# Altium PCB POEInjector.PcbDoc (part 1 of 2)
Units mil, origin at the board's own origin, x right, y up, seen from the top; angles counter-clockwise.
Board outline 5250 x 1900 mil, 4 copper layers (Top Layer, GND Plane, 24V Plane, Bottom Layer), stack 30.634 mil thick; 65 components, 70 nets, 262 pads, 25 vias.
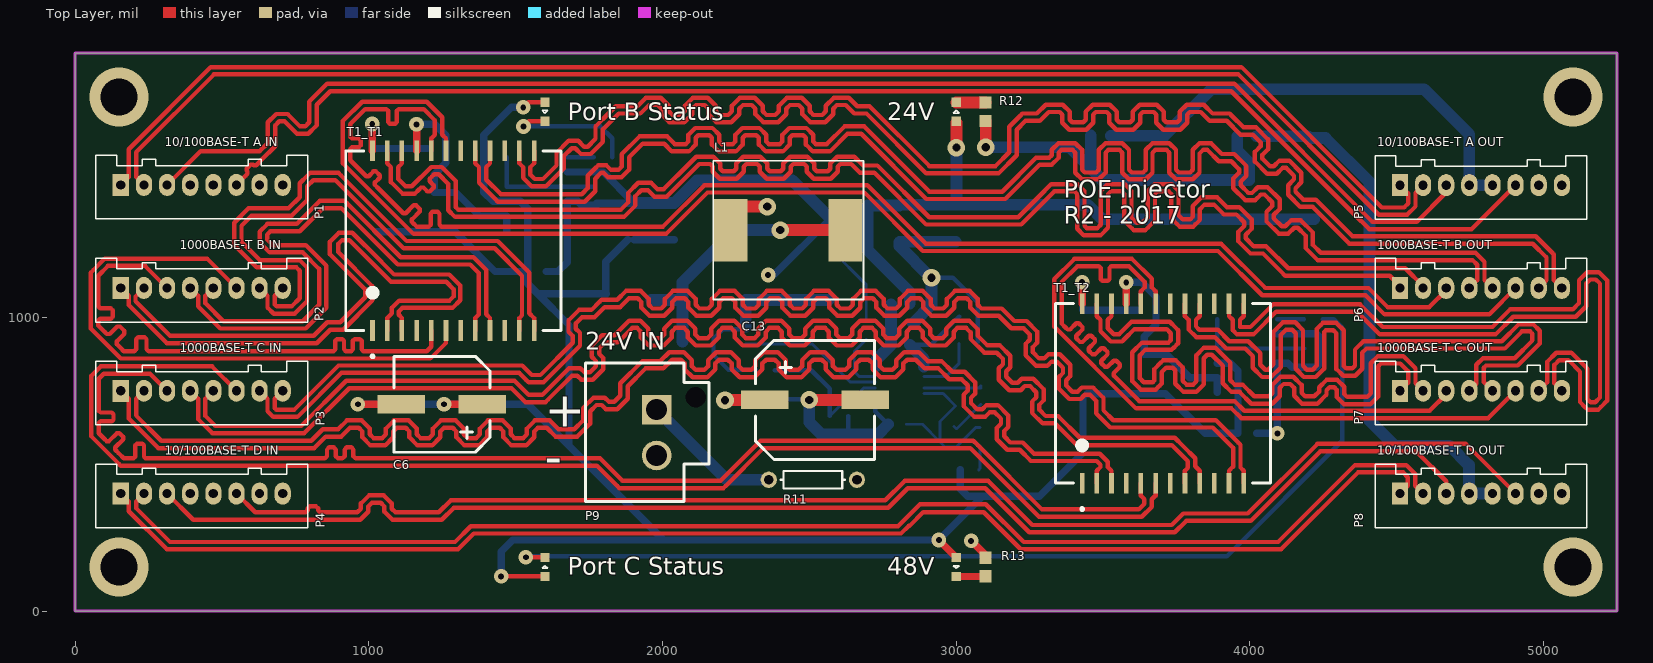
[diagram p0: Top Layer view]
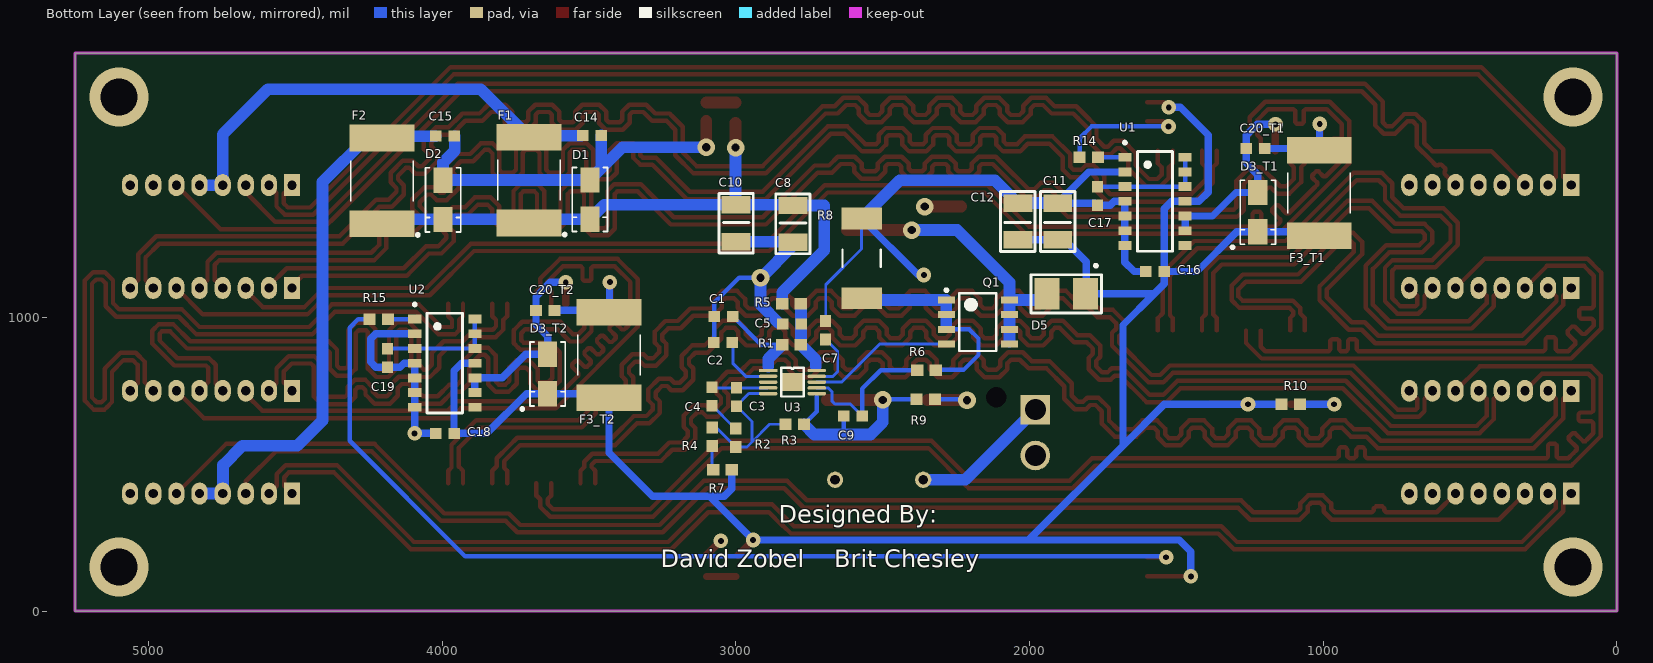
[diagram p1: Bottom Layer view, seen from below]
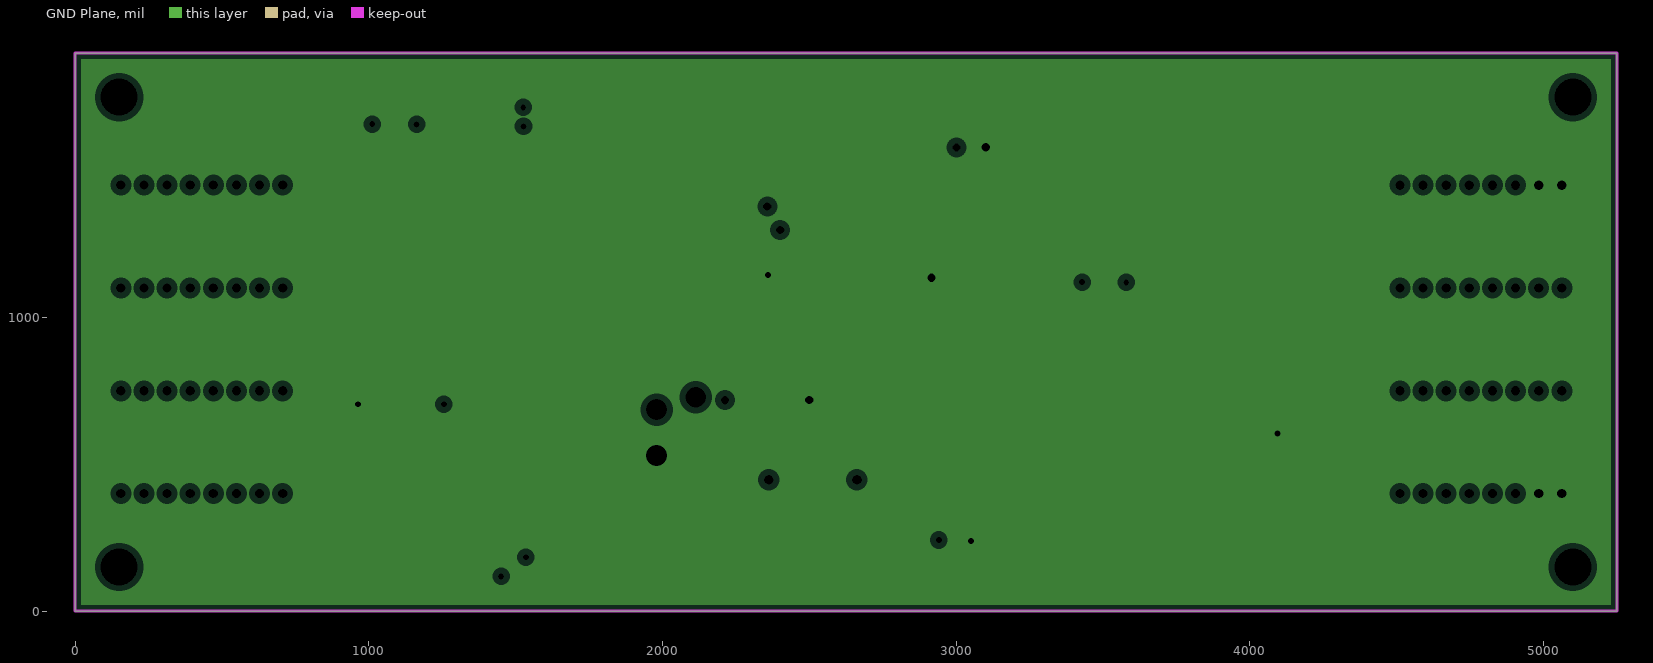
[diagram p2: GND Plane, clearances drawn from the general rule]
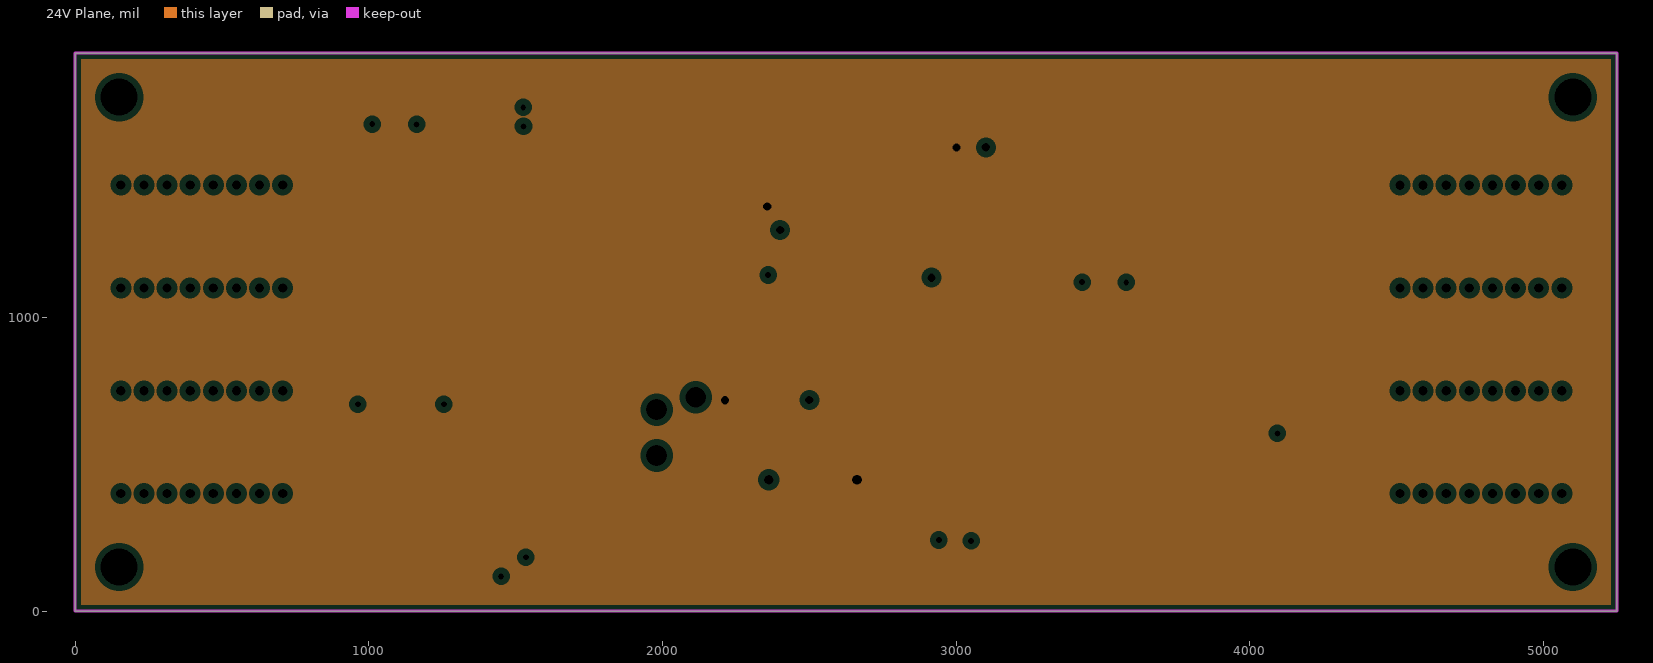
[diagram p3: 24V Plane, clearances drawn from the general rule]
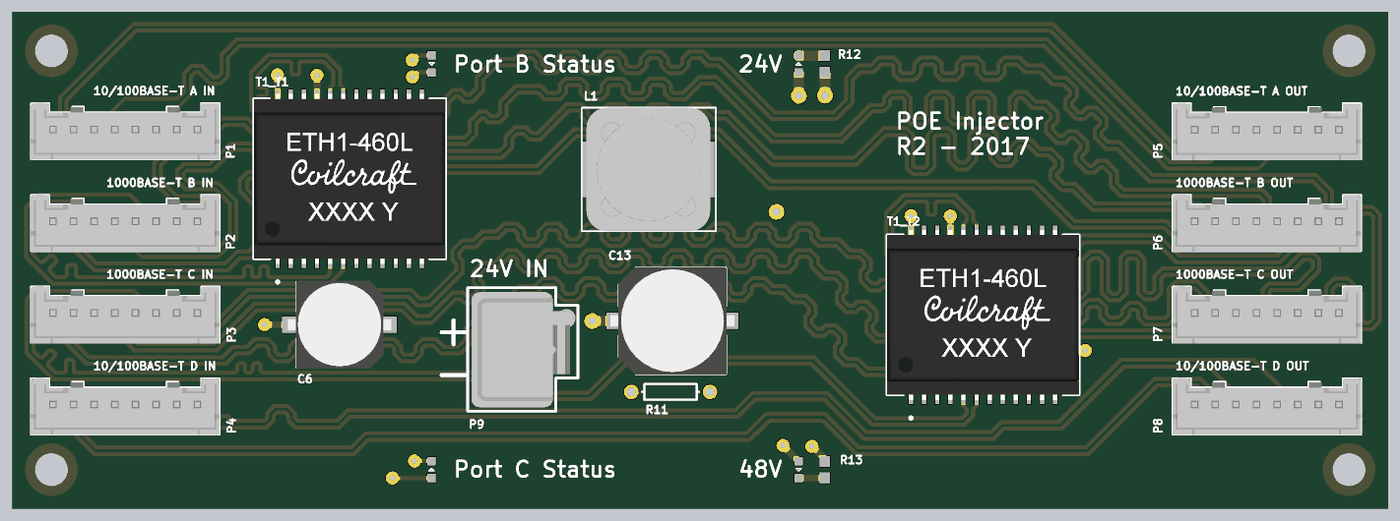
[diagram p5: 3D render of the assembled board from above, using the file's embedded part models]

## Layer stack, top to bottom
Top Solder: solder mask 0.4, Solder Resist, Dk 3.5
Top Layer: signal copper 1.4
Dielectric 1: core 10, FR-4, Dk 4.2
GND Plane: plane copper 1.417, net GND
Dielectric 3: prepreg 5, Dk 4.2
24V Plane: plane copper 1.417, net 24V
Dielectric 2: core 10, Dk 4.2
Bottom Layer: signal copper 1.4
Bottom Solder: solder mask 0.4, Solder Resist, Dk 3.5

## Board outline
0,0 0,1900 5250,1900 5250,0

## Design rules (kind name [scope] priority, off if disabled: settings)
Clearance [All] p1: gap=7
DiffPairsRouting [All] p1: maxlimit=10 minlimit=10 mostfreqgap=10 toplayer_minwidth=15 toplayer_maxwidth=20 toplayer_prefwidth=15 bottomlayer_minwidth=15 bottomlayer_maxwidth=20 bottomlayer_prefwidth=15 maxuncoupledlength=500
PlaneClearance [All] p1: clearance=20
PlaneConnect [All] p1: planeconnectstyle=Relief reliefexpansion=25 reliefentries=4 reliefconductorwidth=15 reliefairgap=10
PolygonConnect [All] p1: connectstyle=Relief reliefconductorwidth=15 reliefentries=4 polygonreliefangle="90 Angle" airgapwidth=15
RoutingVias [All] p1: holewidth=20 width=50 viastyle="Through Hole" minholewidth=15 minwidth=50 maxholewidth=28 maxwidth=50
SolderMaskExpansion SolderMaskExpansion_1 [IsVia] p1: expansion=-250
SolderMaskExpansion [All] p2: expansion=4
Width [All] p1: maxlimit=50 minlimit=10 preferedwidth=15
27 further rules are at their usual default settings.

## Classes and differential pairs
component class POEInjectorTop: 24V "24V IN" 48V C14 C15 C16 C17 C18 C19 D1 D2 F1 F2 P1 P2 P3 P4 P5 P6 P7 P8 "Port B Status" "Port C Status" R11 R12 R13 R14 R15 U1 U2
component class G1: C1 C2 C3 C4 C5 C6 C7 C8 C9 C10 C11 C12 C13 C27 D5 L1 Q1 R1 R2 R3 R4 R5 R6 R7 R8 R9 R10 U3
component class T1: C20_T1 D3_T1 F3_T1 T1_T1
component class T2: C20_T2 D3_T2 F3_T2 T1_T2
channel class POEActiveTransformer: T1 T2
differential pair O2: +O2_P -O2_N
differential pair O1: +O1_P -O1_N
differential pair G2: +G2_P -G2_N
differential pair G1: +G1_P -G1_N
differential pair B_IN_T1: +B_IN_T1_P -B_IN_T1_N
differential pair B_IN_T2: +B_IN_T2_P -B_IN_T2_N
differential pair B_OUT_T1: +B_OUT_T1_P -B_OUT_T1_N
differential pair B_OUT_T2: +B_OUT_T2_P -B_OUT_T2_N
differential pair BR_IN_T1: +BR_IN_T1_P -BR_IN_T1_N
differential pair BR_IN_T2: +BR_IN_T2_P -BR_IN_T2_N
differential pair BR_OUT_T1: +BR_OUT_T1_P -BR_OUT_T1_N
differential pair BR_OUT_T2: +BR_OUT_T2_P -BR_OUT_T2_N
differential pair G_IN_T1: +G_IN_T1_P -G_IN_T1_N
differential pair G_IN_T2: +G_IN_T2_P -G_IN_T2_N
differential pair G_OUT_T1: +G_OUT_T1_P -G_OUT_T1_N
differential pair G_OUT_T2: +G_OUT_T2_P -G_OUT_T2_N
differential pair O_IN_T1: +O_IN_T1_P -O_IN_T1_N
differential pair O_IN_T2: +O_IN_T2_P -O_IN_T2_N
differential pair O_OUT_T1: +O_OUT_T1_P -O_OUT_T1_N
differential pair O_OUT_T2: +O_OUT_T2_P -O_OUT_T2_N

## Components (designator, comment, footprint, x,y, rotation, side; value= is the part's Value field where it differs from the comment)
24V "LED" LED0603 3000,1700 r90 top
48V "LED" LED0603 3000,150 r270 top
C1 "Cap" CAPC0603 3041.5,1003 r0 bottom
C2 "Cap" CAPC0603 3043.5,914 r0 bottom
C3 "Cap" CAPC0603 2998,729.5 r270 bottom
C4 "Cap" CAPC0603 3082,730 r270 bottom
C5 "Cap" CAPC0603 2809.5,978 r0 bottom
C6 "Cap Tant" PCE3917CT-ND 1249,704 r180 top
C7 "Cap" CAPC0603 2694,956 r90 bottom
C8 "CAP1210" CAP1210 2806,1381.79 r90 bottom
C9 "Cap" CAPC0603 2601,664 r0 bottom
C10 "CAP1210" CAP1210 2999,1383.79 r90 bottom
C11 "CAP1210" CAP1210 1904,1263 r270 bottom
C12 "CAP1210" CAP1210 2040,1263 r270 bottom
C13 "Cap Tant" PCE3921CT-ND 2519,719 r0 top
C14 "Cap" CAPC0603 3490,1619 r180 bottom
C15 "Cap" CAPC0603 3991,1617 r180 bottom
C16 "Cap" CAPC0603 1573,1156 r0 bottom
C17 "Cap" CAPC0603 1768,1413 r270 bottom
C18 "Cap" CAPC0603 3991,605 r0 bottom
C19 "Cap" CAPC0603 4186,862 r270 bottom
C20_T1 "Cap" CAPC0603 1231,1575 r0 bottom (schematic designator C20)
C20_T2 "Cap" CAPC0603 3649,1024 r0 bottom (schematic designator C20)
D1 "Zener" SMASeries 3497,1401 r90 bottom
D2 "Zener" SMASeries 3997,1400 r90 bottom
D3_T1 "Zener" SMASeries 1223,1358 r90 bottom (schematic designator D3)
D3_T2 "Zener" SMASeries 3641,807 r90 bottom (schematic designator D3)
D5 "Diode" MBRS360SMB 1875,1080 r180 bottom
F1 "PTC Fuse" PTC7451X11N 3704,1467 r90 bottom
F2 "PTC Fuse" PTC7451X11N 4205,1465 r90 bottom
F3_T1 "PTC Fuse" PTC7451X11N 1014,1423 r270 bottom (schematic designator F3)
F3_T2 "PTC Fuse" PTC7451X11N 3432,872 r270 bottom (schematic designator F3)
L1 "37392C" 732-1247-1-ND 2232,1297 r90 top
P1 "MOLEX-HDR-1x8-SHERLOCK_VERT" MOLEX-HDR-1X8-SHERLOCK-VERT 156,1451 r180 top
P2 "MOLEX-HDR-1x8-SHERLOCK_VERT" MOLEX-HDR-1X8-SHERLOCK-VERT 156,1100 r180 top
P3 "MOLEX-HDR-1x8-SHERLOCK_VERT" MOLEX-HDR-1X8-SHERLOCK-VERT 156,750 r180 top
P4 "MOLEX-HDR-1x8-SHERLOCK_VERT" MOLEX-HDR-1X8-SHERLOCK-VERT 156,400 r180 top
P5 "MOLEX-HDR-1x8-SHERLOCK_VERT" MOLEX-HDR-1X8-SHERLOCK-VERT 4511,1450 r180 top
P6 "MOLEX-HDR-1x8-SHERLOCK_VERT" MOLEX-HDR-1X8-SHERLOCK-VERT 4511,1100 r180 top
P7 "MOLEX-HDR-1x8-SHERLOCK_VERT" MOLEX-HDR-1X8-SHERLOCK-VERT 4511,750 r180 top
P8 "MOLEX-HDR-1x8-SHERLOCK_VERT" MOLEX-HDR-1X8-SHERLOCK-VERT 4511,400 r180 top
P9 "TE-AMP-CONN-2POS" "TE AMP CONN 2POS" 1738,845 r270 top
"Port B Status" "LED" LED0603 1600,1700 r270 top
"Port C Status" "LED" LED0603 1600,150 r90 top
Q1 "SI4850EY" SOIC-8-NO-EP 2176,984 r180 bottom
R1 "Res" RES0603 2810.5,907 r0 bottom
R2 "Res" RES0603 3000,590 r270 bottom
R3 "Res" RES0603 2799.5,636 r180 bottom
R4 "Res" RES0603 3081,593.5 r270 bottom
R5 "Res" RES0603 2810.5,1047 r180 bottom
R6 "Res" RES0603 2351,820 r0 bottom
R7 "Res" RES0603 3045.5,481 r180 bottom
R8 "Res" RES2512 2572,1200.83 r90 bottom
R9 "Res" RES0603 2354,721 r0 bottom
R10 "Res" RES0603 1111.2,704 r180 bottom
R11 "Res" AXIAL-0.3 2512,447 r0 top
R12 "Res" RES0603 3100,1700 r270 top
R13 "Res" RES0603 3100,150 r90 top
R14 "Res" RES0603 1798,1545 r0 bottom
R15 "Res" RES0603 4216,994 r0 bottom
T1_T1 "ETH1-460" ETH1-460 1288,1261 r0 top (schematic designator T1)
T1_T2 "ETH1-460" ETH1-460 3704,741 r0 top (schematic designator T1)
U1 "LTC4263" LTC4263 1573,1395 r270 bottom
U2 "LTC4263" LTC4263 3991,844 r270 bottom
U3 "TPS40210DGQ" TPS40210 2890,819 r180 bottom

## Footprints (in the part's own frame and the unit in brackets; to place one, negate y for a bottom-side part, rotate by r counter-clockwise, add the part's x,y. Pads: shape width x height; smd on the part's side, far side on the other; paste and mask are expansions set on the pad)
732-1247-1-ND [mm] "FIXED IND 68UH 3.2A 89 MOHM SMD"
  rect 5.4x2.9 smd: 0(0,0) 1(0,-9.9)
  silkscreen extent -6,-11.5 6,1.5, body extent -6,-10.95 6,1.05, height 10.38
AXIAL-0.3 [mm] "Axial Device, Thru-Hole; 2 Leads; 0.3 in Pin Spacing"
  round 1.4 hole 0.85: 1(-3.81,0) 2(3.81,0)
  silkscreen extent -2.77,-0.76 2.77,0.76
CAP1210 [mm]
  rect 1.5x2.5 smd: 1(-0.02,0) 2(-3.2,0)
  silkscreen extent -4.2,-1.48 0.97,1.48, body extent -3.22,-1.25 0,1.26, height 2.5
CAPC0603 [mm] "Chip Capacitor, 2-Leads, Body 1.60x0.80mm, IPC Medium Density"
  rect 1x0.95 smd: 1(-0.8,0) 2(0.8,0)
  body extent -0.88,-0.48 0.87,0.48, height 0.8
ETH1-460 [mm] "\"PoE Plus\" Transformers Audio & Signal ETH1 60W 4pairs PoE+ Magnetic Module"
  rect 0.4x1.78 smd: 1(-6.985,-7.765) 2(-5.715,-7.765) 3(-4.445,-7.765) 4(-3.175,-7.765) 5(-1.905,-7.765) 6(-0.635,-7.765) 7(0.635,-7.765) 8(1.905,-7.765) 9(3.175,-7.765) 10(4.445,-7.765) 11(5.715,-7.765) 12(6.985,-7.765) 13(6.985,7.765) 14(5.715,7.765) 15(4.445,7.765) 16(3.175,7.765) 17(1.905,7.765) 18(0.635,7.765) 19(-0.635,7.765) 20(-1.905,7.765) 21(-3.175,7.765) 22(-4.445,7.765) 23(-5.715,7.765) 24(-6.985,7.765)
  silkscreen extent -9.3,-10.12 9.3,7.77, body extent -9.3,-8.25 9.3,8.25, height 10.16
LED0603 [mm] "Chip LED, 2-Leads, Body 1.60x0.80mm, IPC Medium Density"
  rect 0.8x0.8 smd: A(-0.825,0) C(0.825,0)
  silkscreen extent -0.13,-0.25 0.12,0.25, body extent -0.88,-0.48 0.87,0.47, height 0.8
LTC4263 [mil] "S Package 14-Lead Plastic SO Footprint"
  rect 30x45 smd: 1(-150,-102.5) 2(-100,-102.5) 3(-50,-102.5) 4(0,-102.5) 5(50,-102.5) 6(100,-102.5) 7(150,-102.5) 8(150,102.5) 9(100,102.5) 10(50,102.5) 11(0,102.5) 12(-50,102.5) 13(-100,102.5) 14(-150,102.5)
  silkscreen extent -205,-107 170,60, body extent -172,-122 172,122, height 69
MBRS360SMB [mil]
  rect 85x107.99 smd: A(-65.76,0) C(65.76,0)
  silkscreen extent -120,-65 120,101, body extent -105,-60 103,55, height 95
MOLEX-HDR-1X8-SHERLOCK-VERT [mm] "8 Positions Header Connector 0.079\" (2.00mm) Through Hole Tin"
  rect 1.397x1.905 hole 0.8: 1(0,0)
  oval 1.397x1.905 hole 0.8: 2(-2,0) 3(-4,0) 4(-6,0) 5(-8,0) 6(-10,0) 7(-12,0) 8(-14,0)
  silkscreen extent -16.15,-2.55 2.15,2.95, body extent -16.14,-2.57 2.16,2.98, height 9.25
PCE3917CT-ND [mm] "CAP ALUM 100UF 20% 50V SMD"
  rect 4.1x1.6 smd: 1(-3.5,0) 2(3.5,0)
  silkscreen extent -4.15,-4.15 4.15,4.15, body extent -5,-4.25 5,4.25, height 10.54
PCE3921CT-ND [mm] "CAP ALUM 220UF 20% 50V SMD"
  rect 4.1x1.6 smd: 1(-4.35,0) 2(4.35,0)
  silkscreen extent -5.15,-5.15 5.15,5.15, body extent -5.99,-5.25 5.99,5.25, height 10.54
PTC7451X11N [mm] "Chip PTC, 2920, 7351 metric 2-Leads, Body 7.36x5.12mm, IPC Medium Density"
  rect 2.3x5.6 smd: 1(-3.7,0) 2(3.7,0)
  silkscreen extent -1.75,-2.7 1.75,2.7, body extent -3.99,-2.72 3.99,2.72, height 1.15
RES0603 [mm] "Chip Resistor, 2-Leads, Body 1.60x0.80mm, IPC Medium Density"
  rect 1.05x1 smd: 1(-0.8,0) 2(0.8,0)
  body extent -0.88,-0.48 0.87,0.47, height 0.8
RES2512 [mm] "Chip Resistor, 2-Leads, Body 6.35x3.20mm, IPC Medium Density"
  rect 1.9x3.5 smd: 1(-3.45,0) 2(3.45,0)
  silkscreen extent -0.75,-1.65 0.75,1.65, body extent -3.22,-1.68 3.22,1.67, height 0.65
SMASeries [mil]
  rect 86x65 smd: A(67,0) C(-67,0)
  silkscreen extent -124,-60 109,91, body extent -104,-55 104,55, height 92
SOIC-8-NO-EP [mm] "SOIC, 8-Leads, Body 4.90x3.90mm, Pitch 1.27mm, IPC Medium Density"
  rect 1.45x0.6 smd: 1(-2.725,1.905) 2(-2.725,0.635) 3(-2.725,-0.635) 4(-2.725,-1.905) 5(2.725,-1.905) 6(2.725,-0.635) 7(2.725,0.635) 8(2.725,1.905)
  silkscreen extent -2.85,-2.5 1.6,2.88, body extent -2,-2.5 2,2.5, height 1.75
"TE AMP CONN 2POS" [mm] "CONN HEADER 2POS STR .156 TIN"
  round 0 hole 1.78: 0(2.97,9.55)
  rect 2.562x2.562 hole 1.81: 1(4.05,6.15)
  round 2.562 hole 1.81: 2(8.01,6.15)
  silkscreen extent 0,0 11.98,10.68, body extent 0.43,0.36 11.6,10.25, height 12
TPS40210 [mm]
  rect 1.6x0.3 smd: 1(0,0)
  oval 1.6x0.3 smd: 2(0,-0.5) 3(0,-1) 4(0,-1.5) 5(0,-2) 6(4.2,-2) 7(4.2,-1.5) 8(4.2,-1) 9(4.2,-0.5) 10(4.2,0)
  rect 1.88x1.57 smd: 11(2.108,-0.991)
  silkscreen extent 1.14,-2.25 3.07,0.25, body extent -0.36,-2.52 4.56,0.48, height 1.2

## Part data
C6: library part CapPol, "CAP ALUM 100UF 20% 50V SMD"
C8 C10 C11 C12: "CAP CER 10UF 50V 20% X5R 1210"
C13: library part CapPol, "CAP ALUM 220UF 20% 50V SMD"
D1 D2 D3_T1 D3_T2: "Zener Diode"
D5: "Standard Diode Template"
F1 F2 F3_T1 F3_T2: library part PTC_Fuse
L1: "INDUCTOR 3.90UH 10.0A SMD"
P1 P2 P3 P4 P5 P6 P7 P8: "CONN HEADER 8POS 2MM VERT TIN"
P9: "2 Positions Header Connector 0.156\" (3.96mm) Through Hole Tin"
Q1: "MOSFET N-CH 60V 6A 8-SOIC"
T1_T1 T1_T2: "\"PoE Plus\" Transformers Audio & Signal ETH1 60W 4pairs PoE+ Magnetic Module"
U1 U2: "IC POE 803.2AF SINGL PSE 14-SOIC"

## Via types
v1: diameter 50, hole 20, Top Layer to Bottom Layer, 14 vias
v2: diameter 60, hole 28, Top Layer to Bottom Layer, 7 vias
v3: diameter 200, hole 125, Top Layer to Bottom Layer, 4 vias

## Nets (pads, with @x,y where several pads share a name; then routed paths per layer and width w, separated by ;. In a path a pad name is that pad's centre, name@x,y a point inside that pad or via, vN(x,y) a via of type N, cw(c..) or ccw(c..) an arc to the next point about the centre after c; other vN are vias at no path point)
24V: 24V.A C8.1 C10.1 C13.1 D1.C D2.C F1.1 F2.1 L1.0 R5.1 R9.1 R11.2 | length 2577.1
  Top Layer w40: v2@2213,719 C13.1@2347.74,719 ; L1.0@2233,1377 v2(2357,1377) ; v2(3001,1578) 24V.A@3001,1662.52
  Bottom Layer w15: v2@2216,721 R9.1@2322.5,721
  Bottom Layer w40: R5.1@2842,1047 2842,1085 2699,1228 2699,1381 C8.1@2806,1381 2808,1383 C10.1@2999,1383 3448,1383 D1.C@3497,1334 F2.1@4219,1334 ; C10.1@3001,1385 v2(3001,1578)
  other v2: 2213,718
48V: 48V.A "Port B Status.A" "Port C Status.A" C6.1 C11.1 C12.1 C16.1 C18.1 D3_T1.C D3_T2.C D5.C F3_T1.2 F3_T2.2 R7.2 R10.1 U1.11 U2.11 | length 7452.7
  Top Layer w15: v1(1451,118) 1599.52,118 ; v1(1526,1715) 1543.48,1732.48 1600,1732.48
  Top Layer w25: v1(1256,704) C6.1@1386.8,704 ; v1(2941,242) 48V.A@2994,189
  Bottom Layer w25: F3_T1.2@1027.67,1291 D3_T1.C@1223,1291 1295,1291 1430,1156 C16.1@1541.5,1156 ; R10.1@1142.7,704 v1(1256,704) 1541,704 1682,563 ; v1(1451,118) 1451,203 1490,242 v1(2941,242) 3090,391 ; v1(1526,1715) 1486,1715 1392,1621 1392,1426 1423,1395 U1.11@1470.5,1395 1516,1395 1541.5,1369.5 C16.1@1541.5,1156 ; D5.C@1807.5,1081.75 1807.5,1189 C11.1@1882.28,1263.79 ; D5.C@1809.24,1080 1576,1080 ; C11.1@1904,1263.79 C12.1@2040,1263.79 ; 2002.5,242.5 1682,563 ; R7.2@3014.01,481 3014.01,415.99 3039,391 3090,391 ; F3_T2.2@3432,726.33 3432,539 3284,391 3090,391 ; F3_T2.2@3445.67,740 D3_T2.C@3641,740 3713,740 3848,605 C18.1@3959.5,605 3959.5,818.5 3934,844 U2.11@3888.5,844 ; C16.1@1541.5,1156 1541.5,1114.5 1576,1080 ; 1576,1080 1682,974 1682,563
B_IN_T1_N: P2.5 T1_T1.9 | length 2020.4
  Top Layer w15: P2.5@470.96,1100 444.09,1073.13 444.09,1048 505.09,987 775,987 831,1043 831,1165 775,1221 662.64,1221 629,1254.64 629,1292 655,1318 755,1318 833.85,1396.85 917.5,1396.85 924.82,1389.53 1109.36,1205 1356.36,1205 1400,1161.36 1400,1010.83 1413,997.83 T1_T1.9@1413,955.29
B_IN_T1_P: P2.4 T1_T1.8 | length 2020
  Top Layer w15: P2.4@392.22,1100 419.09,1073.13 419.09,1037.64 494.74,962 785.36,962 856,1032.64 856,1175.36 785.36,1246 673,1246 654,1265 654,1281.64 665.36,1293 765.36,1293 844.21,1371.85 907.15,1371.85 1099,1180 1346,1180 1375,1151 1375,1009.83 1363,997.83 T1_T1.8@1363,955.29
B_IN_T2_N: P3.5 T1_T2.9 | length 4687.5
  Top Layer w15: P3.5@470.96,750 444.09,723.13 444.09,664 478.09,630 769.64,630 923.64,784 1496.36,784 1544.18,736.18 1591.4,736.18 1681.8,826.59 1720.44,826.59 1734.59,812.44 1752.51,812.44 1773.48,833.4 1773.48,851.33 1759.33,865.48 1759.33,904.12 1794.94,939.72 1837.37,939.72 1886.64,989 1924.18,989 1951.5,961.68 1951.5,941.68 1964.18,929 1993.82,929 2006.5,941.68 2006.5,961.68 2033.82,989 2084.18,989 2111.5,961.68 2111.5,941.68 2124.18,929 2153.82,929 2166.5,941.68 2166.5,961.68 2193.82,989 2244.18,989 2271.5,961.68 2271.5,941.68 2284.18,929 2313.82,929 2326.5,941.68 2326.5,961.68 2353.82,989 2404.18,989 2431.5,961.68 2431.5,941.68 2444.18,929 2473.82,929 2486.5,941.68 2486.5,961.68 2513.82,989 2564.18,989 2591.5,961.68 2591.5,941.68 2604.18,929 2633.82,929 2646.5,941.68 2646.5,961.68 2673.82,989 2724.18,989 2751.5,961.68 2751.5,941.68 2764.18,929 2793.82,929 2806.5,941.68 2806.5,961.68 2833.82,989 2884.18,989 2911.5,961.68 2911.5,941.68 2924.18,929 2953.82,929 2966.5,941.68 2966.5,961.68 2993.82,989 3044.18,989 3074.18,959 3074.18,936.82 3106.55,904.45 3148.98,904.45 3184.59,868.84 3184.59,830.2 3170.44,816.06 3170.44,798.13 3191.4,777.17 3209.33,777.17 3223.48,791.31 3262.12,791.31 3297.72,755.7 3297.72,717.06 3283.58,702.92 3283.58,684.99 3304.54,664.03 3346.97,664.03 3421,590 3744.36,590 3772.36,562 3814,520.36 3814,492.83 3829,477.83 T1_T2.9@3829,435.29
B_IN_T2_P: P3.4 T1_T2.8 | length 4685.4
  Top Layer w15: P3.4@392.22,750 419.09,723.13 419.09,653.64 467.74,605 780,605 934,759 1486,759 1533.82,711.18 1601.75,711.18 1609.07,718.5 1692.16,801.59 1710.09,801.59 1724.23,787.44 1762.87,787.44 1798.48,823.05 1798.48,861.69 1784.33,875.83 1784.33,893.76 1805.3,914.72 1847.72,914.72 1897,964 1913.82,964 1926.5,951.32 1926.5,931.32 1953.82,904 2004.18,904 2031.5,931.32 2031.5,951.32 2044.18,964 2073.82,964 2086.5,951.32 2086.5,931.32 2113.82,904 2164.18,904 2191.5,931.32 2191.5,951.32 2204.18,964 2233.82,964 2246.5,951.32 2246.5,931.32 2273.82,904 2324.18,904 2351.5,931.32 2351.5,951.32 2364.18,964 2393.82,964 2406.5,951.32 2406.5,931.32 2433.82,904 2484.18,904 2511.5,931.32 2511.5,951.32 2524.18,964 2553.82,964 2566.5,951.32 2566.5,931.32 2593.82,904 2644.18,904 2671.5,931.32 2671.5,951.32 2684.18,964 2713.82,964 2726.5,951.32 2726.5,931.32 2753.82,904 2804.18,904 2831.5,931.32 2831.5,951.32 2844.18,964 2873.82,964 2886.5,951.32 2886.5,931.32 2913.82,904 2964.18,904 2991.5,931.32 2991.5,951.32 3004.18,964 3033.82,964 3049.18,948.64 3049.18,926.47 3096.2,879.45 3138.62,879.45 3159.59,858.49 3159.59,840.56 3145.44,826.41 3145.44,787.78 3181.05,752.17 3219.69,752.17 3233.83,766.31 3251.76,766.31 3272.72,745.35 3272.72,727.42 3258.58,713.28 3258.58,674.64 3294.19,639.03 3336.61,639.03 3410.64,565 3734,565 3789,510 3789,487.83 3779,477.83 T1_T2.8@3779,435.29
B_OUT_T1_N: P6.5 T1_T1.16 | length 5034
  Top Layer w15: T1_T1.16@1413,1566.71 1413,1524.17 1400.5,1511.67 1400.5,1468.5 1450,1419 1725,1419 1745.98,1439.98 1745.98,1482.4 1772.64,1509.07 1780.88,1517.3 1809.62,1517.3 1824.92,1502 1850.43,1502 1861.94,1513.52 1861.94,1555.94 1922,1616 2016.18,1616 2042.18,1590 2079.82,1590 2088.5,1598.68 2088.5,1621.43 2111.82,1644.75 2170.18,1644.75 2193.5,1621.43 2193.5,1598.68 2202.18,1590 2239.82,1590 2248.5,1598.68 2248.5,1621.43 2271.82,1644.75 2330.18,1644.75 2353.5,1621.43 2353.5,1598.68 2362.18,1590 2399.82,1590 2408.5,1598.68 2408.5,1621.43 2431.82,1644.75 2490.18,1644.75 2513.5,1621.43 2513.5,1598.68 2522.18,1590 2559.82,1590 2619.82,1650 2687,1650 2909,1428 3157,1428 3272,1543 3316.41,1543 3325.68,1552.26 3325.68,1570.26 3348.41,1593 3405.94,1593 3428.68,1570.26 3428.68,1502.26 3437.94,1493 3476.41,1493 3485.68,1502.26 3485.68,1570.26 3508.41,1593 3565.94,1593 3588.68,1570.26 3588.68,1502.26 3597.94,1493 3636.41,1493 3645.68,1502.26 3645.68,1570.26 3668.41,1593 3725.94,1593 3748.68,1570.26 3748.68,1502.26 3757.94,1493 3796.41,1493 3805.68,1502.26 3805.68,1570.26 3828.41,1593 3867.94,1593 3904.66,1556.28 3947.09,1556.28 3988.35,1515.01 3988.35,1482.03 3968.56,1462.23 3968.56,1449.96 3995.17,1423.34 4007.45,1423.34 4027.25,1443.14 4060.23,1443.14 4101.49,1401.88 4101.49,1368.89 4081.69,1349.09 4081.69,1336.82 4108.31,1310.2 4120.58,1310.2 4140.38,1330 4173.37,1330 4214.63,1288.74 4214.63,1246.31 4240.94,1220 4768.36,1220 4799,1189.36 4799,1126.96 P6.5@4825.96,1100
B_OUT_T1_P: P6.4 T1_T1.17 | length 5033.9
  Top Layer w15: T1_T1.17@1363,1566.71 1363,1524.17 1375.5,1511.67 1375.5,1458.14 1432.32,1401.32 1439.64,1394 1735.36,1394 1770.98,1429.62 1770.98,1472.05 1791.23,1492.3 1799.26,1492.3 1814.56,1477 1860.78,1477 1886.94,1503.16 1886.94,1545.59 1932.36,1591 2005.82,1591 2031.82,1565 2090.18,1565 2113.5,1588.32 2113.5,1611.07 2122.18,1619.75 2159.82,1619.75 2168.5,1611.07 2168.5,1588.32 2191.82,1565 2250.18,1565 2273.5,1588.32 2273.5,1611.07 2282.18,1619.75 2319.82,1619.75 2328.5,1611.07 2328.5,1588.32 2351.82,1565 2410.18,1565 2433.5,1588.32 2433.5,1611.07 2442.18,1619.75 2479.82,1619.75 2488.5,1611.07 2488.5,1588.32 2511.82,1565 2570.18,1565 2630.18,1625 2676.64,1625 2898.64,1403 3167.36,1403 3284.36,1520 3325.94,1520 3348.68,1542.74 3348.68,1560.74 3357.94,1570 3396.41,1570 3405.68,1560.74 3405.68,1492.74 3428.41,1470 3485.94,1470 3508.68,1492.74 3508.68,1560.74 3517.94,1570 3556.41,1570 3565.68,1560.74 3565.68,1492.74 3588.41,1470 3645.94,1470 3668.68,1492.74 3668.68,1560.74 3677.94,1570 3716.41,1570 3725.68,1560.74 3725.68,1492.74 3748.41,1470 3805.94,1470 3828.68,1492.74 3828.68,1557.91 3840.77,1570 3855.59,1570 3894.31,1531.28 3936.74,1531.28 3963.35,1504.66 3963.35,1492.39 3943.56,1472.59 3943.56,1439.6 3984.82,1398.34 4017.8,1398.34 4037.6,1418.14 4049.87,1418.14 4076.49,1391.52 4076.49,1379.25 4056.69,1359.45 4056.69,1326.47 4097.96,1285.2 4130.94,1285.2 4150.74,1305 4163.01,1305 4189.63,1278.38 4189.63,1235.96 4230.59,1195 4758,1195 4774,1179 4774,1126.78 P6.4@4747.22,1100
B_OUT_T2_N: P7.5 T1_T2.16 | length 2343.7
  Top Layer w15: T1_T2.16@3829,1046.71 3829,1004.17 3816.5,991.67 3816.5,969 3827.75,957.75 3891.25,957.75 3930,919 3994.36,919 4035,878.36 4035,839 4052,822 4062,822 4080,840 4080,950.36 4112.64,983 4154.36,983 4181,956.36 4181,835 4194,822 4214,822 4228,836 4228,960.36 4241.32,973.68 4248.64,981 4294.36,981 4319.68,955.68 4319.68,834.32 4328,826 4348.64,826 4358,835.36 4358,890.36 4386.64,919 4858,919 4916,977 4964.36,977 4987,954.36 4987,911 4912,836 4804,836 4796,828 4796,779.96 P7.5@4825.96,750
B_OUT_T2_P: P7.4 T1_T2.17 | length 2341.2
  Top Layer w15: T1_T2.17@3779,1046.71 3779,1004.17 3791.5,991.67 3791.5,958.64 3817.39,932.75 3880.89,932.75 3919.64,894 3984,894 4010,868 4010,828.64 4041.64,797 4072.36,797 4105,829.64 4105,940 4123,958 4144,958 4156,946 4156,824.64 4183.64,797 4224.36,797 4253,825.64 4253,950 4259,956 4284,956 4294.68,945.32 4294.68,823.97 4317.64,801 4359,801 4383,825 4383,880 4397,894 4868.36,894 4926.36,952 4954,952 4962,944 4962,921.36 4901.64,861 4793.64,861 4771,838.36 4771,773.78 P7.4@4747.22,750
BR_IN_T1_N: P2.8 T1_T1.12 | length 2042.6
  Top Layer w15: P2.8@707.18,1100 680.31,1073.13 680.31,1043.69 686.68,1037.32 737.32,1037.32 765,1065 765,1159 754,1170 618.64,1170 542,1246.64 542,1322.36 590.64,1371 727,1371 765,1409 765,1456.36 793.32,1484.68 800.64,1492 897,1492 904.32,1484.68 1129,1260 1439.36,1260 1492.36,1207 1539.68,1159.68 1547,1152.36 1547,1013.83 1563,997.83 T1_T1.12@1563,955.29
BR_IN_T1_P: P2.7 T1_T1.11 | length 2039.7
  Top Layer w15: P2.7@628.44,1100 655.31,1073.13 655.31,1033.33 676.32,1012.32 747.68,1012.32 790,1054.64 790,1169.36 764.36,1195 629,1195 567,1257 567,1312 601,1346 737.36,1346 790,1398.64 790,1446 811,1467 886.64,1467 1118.64,1235 1429,1235 1522,1142 1522,1006.83 1513,997.83 T1_T1.11@1513,955.29
BR_IN_T2_N: P3.8 T1_T2.12 | length 4666
  Top Layer w15: P3.8@707.18,750 680.31,723.13 680.31,691 685.31,686 747,686 897,836 1522.36,836 1554.68,803.68 1584.68,803.68 1694.33,913.33 1694.33,936.83 1680.19,950.98 1680.19,989.62 1715.8,1025.22 1758.22,1025.22 1786,1053 1793,1060 1845.82,1060 1875.82,1090 1926.18,1090 1953.5,1062.68 1953.5,1042.68 1966.18,1030 1995.82,1030 2008.5,1042.68 2008.5,1062.68 2035.82,1090 2086.18,1090 2113.5,1062.68 2113.5,1042.68 2126.18,1030 2155.82,1030 2168.5,1042.68 2168.5,1062.68 2195.82,1090 2246.18,1090 2273.5,1062.68 2273.5,1042.68 2286.18,1030 2315.82,1030 2328.5,1042.68 2328.5,1062.68 2355.82,1090 2406.18,1090 2433.5,1062.68 2433.5,1042.68 2446.18,1030 2475.82,1030 2488.5,1042.68 2488.5,1062.68 2515.82,1090 2566.18,1090 2593.5,1062.68 2593.5,1042.68 2606.18,1030 2635.82,1030 2648.5,1042.68 2648.5,1062.68 2675.82,1090 2726.18,1090 2753.5,1062.68 2753.5,1042.68 2766.18,1030 2795.82,1030 2808.5,1042.68 2808.5,1062.68 2835.82,1090 2886.18,1090 2913.5,1062.68 2913.5,1042.68 2926.18,1030 2955.82,1030 2968.5,1042.68 2968.5,1062.68 2995.82,1090 3046.18,1090 3073.5,1062.68 3073.5,1042.68 3086.18,1030 3155,1030 3197.55,987.45 3239.98,987.45 3275.59,951.84 3275.59,913.2 3261.44,899.06 3261.44,881.13 3282.4,860.17 3300.33,860.17 3314.48,874.31 3353.12,874.31 3388.72,838.7 3388.72,800.06 3374.58,785.92 3374.58,767.99 3395.54,747.03 3413.47,747.03 3427.61,761.17 3466.25,761.17 3501.86,725.57 3501.86,683.14 3535,650 3884.36,650 3915.36,619 3960.68,573.68 3968,566.36 3968,488.83 3979,477.83 T1_T2.12@3979,435.29
BR_IN_T2_P: P3.7 T1_T2.11 | length 4667.3
  Top Layer w15: P3.7@628.44,750 655.31,723.13 655.31,680.64 674.96,661 757.36,661 907.36,811 1512,811 1537,786 1544.32,778.68 1588.03,778.68 1595.03,778.68 1719.33,902.98 1719.33,947.19 1705.19,961.33 1705.19,979.26 1726.15,1000.22 1768.58,1000.22 1803.36,1035 1856.18,1035 1886.18,1065 1915.82,1065 1928.5,1052.32 1928.5,1032.32 1955.82,1005 2006.18,1005 2033.5,1032.32 2033.5,1052.32 2046.18,1065 2075.82,1065 2088.5,1052.32 2088.5,1032.32 2115.82,1005 2166.18,1005 2193.5,1032.32 2193.5,1052.32 2206.18,1065 2235.82,1065 2248.5,1052.32 2248.5,1032.32 2275.82,1005 2326.18,1005 2353.5,1032.32 2353.5,1052.32 2366.18,1065 2395.82,1065 2408.5,1052.32 2408.5,1032.32 2435.82,1005 2486.18,1005 2513.5,1032.32 2513.5,1052.32 2526.18,1065 2555.82,1065 2568.5,1052.32 2568.5,1032.32 2595.82,1005 2646.18,1005 2673.5,1032.32 2673.5,1052.32 2686.18,1065 2715.82,1065 2728.5,1052.32 2728.5,1032.32 2755.82,1005 2806.18,1005 2833.5,1032.32 2833.5,1052.32 2846.18,1065 2875.82,1065 2888.5,1052.32 2888.5,1032.32 2915.82,1005 2966.18,1005 2993.5,1032.32 2993.5,1052.32 3006.18,1065 3035.82,1065 3048.5,1052.32 3048.5,1032.32 3075.82,1005 3144.64,1005 3187.2,962.45 3229.62,962.45 3250.59,941.49 3250.59,923.56 3236.44,909.41 3236.44,870.78 3272.05,835.17 3310.69,835.17 3324.83,849.31 3342.76,849.31 3363.72,828.35 3363.72,810.42 3349.58,796.28 3349.58,757.64 3385.19,722.03 3423.83,722.03 3437.97,736.17 3455.9,736.17 3476.86,715.21 3476.86,672.79 3524.64,625 3874,625 3943,556 3943,491.83 3929,477.83 T1_T2.11@3929,435.29
BR_OUT_T1_N: P6.8 T1_T1.13 | length 5009.4
  Top Layer w15: T1_T1.13@1563,1566.71 1563,1524.17 1550.5,1511.67 1550.5,1485.5 1565,1471 1593,1471 1639.22,1517.22 1639.22,1559.65 1680.49,1600.91 1713.47,1600.91 1733.27,1581.11 1745.54,1581.11 1772.16,1607.73 1772.16,1650.16 1817,1695 1841,1719 1914.82,1719 1943.82,1748 1994.18,1748 2021.5,1720.68 2021.5,1701.68 2034.18,1689 2063.82,1689 2076.5,1701.68 2076.5,1720.68 2103.82,1748 2154.18,1748 2181.5,1720.68 2181.5,1701.68 2194.18,1689 2223.82,1689 2236.5,1701.68 2236.5,1720.68 2263.82,1748 2314.18,1748 2341.5,1720.68 2341.5,1701.68 2354.18,1689 2383.82,1689 2396.5,1701.68 2396.5,1720.68 2423.82,1748 2474.18,1748 2501.5,1720.68 2501.5,1701.68 2514.18,1689 2543.82,1689 2556.5,1701.68 2556.5,1720.68 2583.82,1748 2634.18,1748 2663.18,1719 2705,1719 2909,1515 3134,1515 3181,1562 3181,1649.36 3218.32,1686.68 3225.64,1694 3274.82,1694 3304.82,1724 3363.18,1724 3386.5,1700.68 3386.5,1672.68 3395.18,1664 3432.82,1664 3441.5,1672.68 3441.5,1700.68 3464.82,1724 3523.18,1724 3546.5,1700.68 3546.5,1672.68 3555.18,1664 3592.82,1664 3601.5,1672.68 3601.5,1700.68 3624.82,1724 3683.18,1724 3706.5,1700.68 3706.5,1672.68 3715.18,1664 3752.82,1664 3761.5,1672.68 3761.5,1700.68 3784.82,1724 3843.18,1724 3873.18,1694 3931.36,1694 3938.68,1686.68 3978.4,1646.95 4020.83,1646.95 4062.09,1605.69 4062.09,1572.71 4042.29,1552.91 4042.29,1540.64 4068.91,1514.02 4081.18,1514.02 4100.98,1533.82 4133.96,1533.82 4175.23,1492.55 4175.23,1459.57 4155.43,1439.77 4155.43,1427.5 4182.05,1400.88 4224.47,1400.88 4349.36,1276 4973.36,1276 5027.68,1221.68 5035,1214.36 5035,1127.18 P6.8@5062.18,1100